# EAGLE board power (EAGLE 6.4)
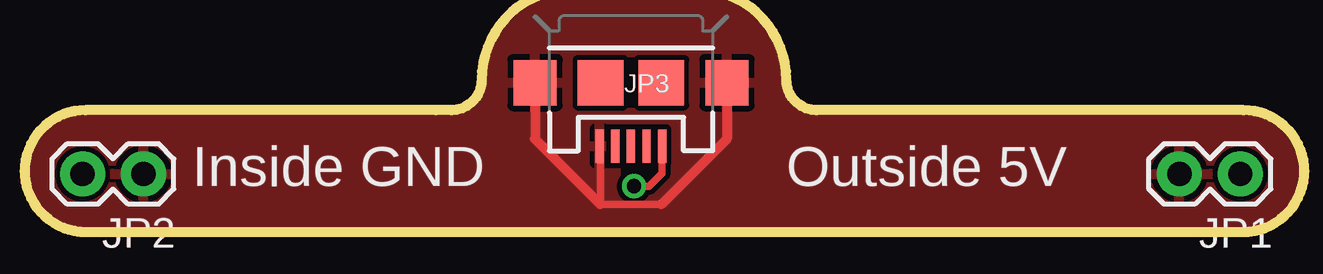
[diagram p0: board, top side]
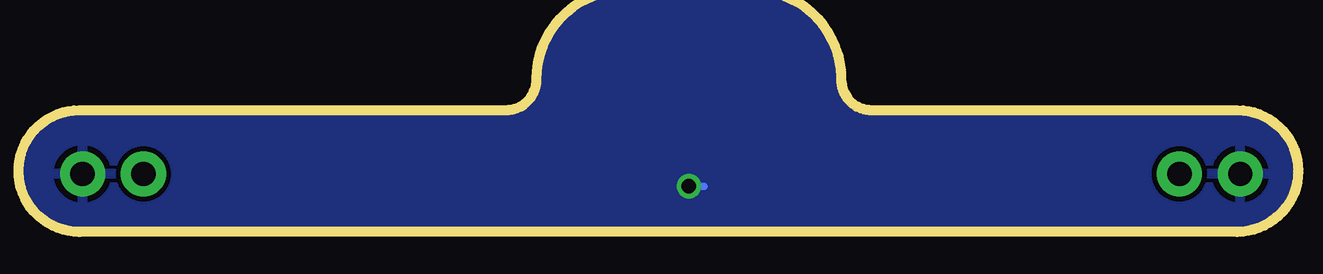
[diagram p1: board, bottom side, seen from below]

No outline drawn. Coordinates in mm, seen from the top.
Copper layers (1*16): Top 0.035mm / dielectric 1.5mm / Bottom 0.035mm
Design rules "default": minimum track width 10mil, minimum drill 24mil, track to track 8mil, track to pad 8mil, pad to pad 8mil, via to via 8mil, smd to smd 8mil, copper to edge 40mil, drill to drill 8mil, minimum pad ring 10mil, minimum via ring 8mil, stop-mask expansion 4mil, vias tented up to drill 0mil, thermal gap 10mil
Milling: 14 lines

## Footprints (pad centres in the part's own frame; a part is rotated, then mirrored left to right if it is on the bottom)
1X02 = drill 1.016 pad 1.88: 1 0,0; 2 2.54,0
USB-MICROB = smd 0.35 x 1.4: D+ 0,2.65; D- -0.65,2.65; GND 1.3,2.65; ID 0.65,2.65; VBUS -1.3,2.65 | smd 1.8 x 1.9: MT1 -4,0; MT2 4,0 | smd 1.9 x 1.9: P$1 -1.27,0; P$2 1.27,0

## Placement (x,y rotation side)
JP1  [1X02]  64.01,4.32 180 top
JP2  [1X02]  18.29,4.32 180 top
JP3  USB-MICROB  [USB-MICROB]  38.61,8.13 180 top

## Library data of the parts
JP1 JP2 = SparkFun-Connectors
JP3 = SparkFun-Connectors; PROD_ID: CONN-09505

## Nets
5V: JP1.1 JP2.2 JP3.VBUS
GND: JP1.2 JP2.1 JP3.GND JP3.MT1 JP3.MT2

## Tracks (layer width: path | path; a pad name or v marks a point on that pad's centre or on a via)
5V  (via drill 0.6)
  Top 0.305: JP3.VBUS 39.91,4.35 39.37,3.81 v38.73,3.81
  Bottom 0.305: v38.73,3.81 38.1,3.81
  pour Bottom: 15.88,6.99 arc90 13.34,4.45 arc90 15.88,1.91 64.14,1.91 arc90 66.67,4.45 arc90 64.14,6.99 46.35,6.99 arc-90 45.09,8.26 arc90 41.27,12.06 38.73,12.06 36.2,12.06 arc90 32.38,8.26 32.38,8.26 arc-90 31.11,6.99
GND
  Top 0.305: JP3.GND 37.34,5.45 37.34,3.05 39.88,3.05
  Top 0.406: JP3.MT1 42.61,5.78 39.88,3.05 | JP3.MT2 34.61,5.78 37.34,3.05
  pour Top: 15.88,6.99 arc90 13.34,4.45 arc90 15.88,1.91 64.14,1.91 arc90 66.67,4.45 arc90 64.14,6.99 46.35,6.99 arc-90 45.09,8.26 arc90 41.27,12.06 37.47,12.06 36.2,12.06 arc90 32.38,8.26 arc-90 31.11,6.99

## Text on the board
tPlace: Inside GND | Outside 5V